# Altium PCB PID Controller.PcbDoc
Units mm, origin at the board's own origin, x right, y up, seen from the top; angles counter-clockwise.
Board outline 114.55 x 70.6 mm, 2 copper layers (Top Layer, Bottom Layer); 26 components, 18 nets, 84 pads, 16 vias.
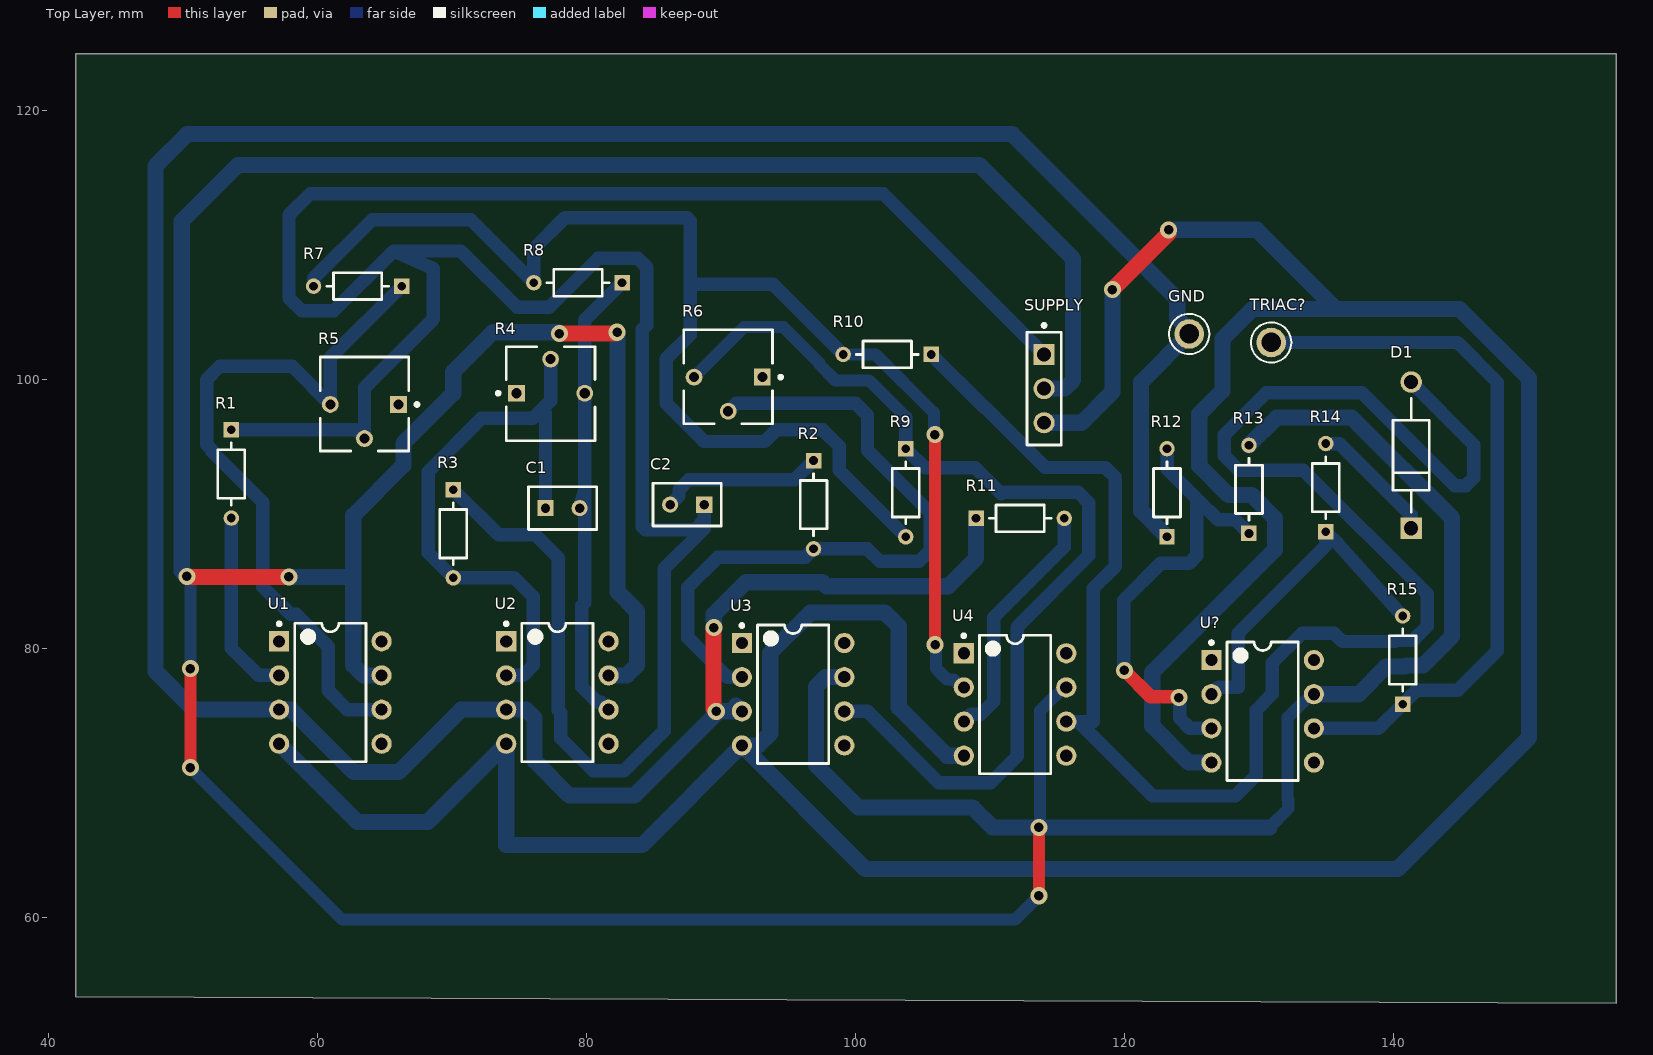
[diagram p0: Top Layer view]
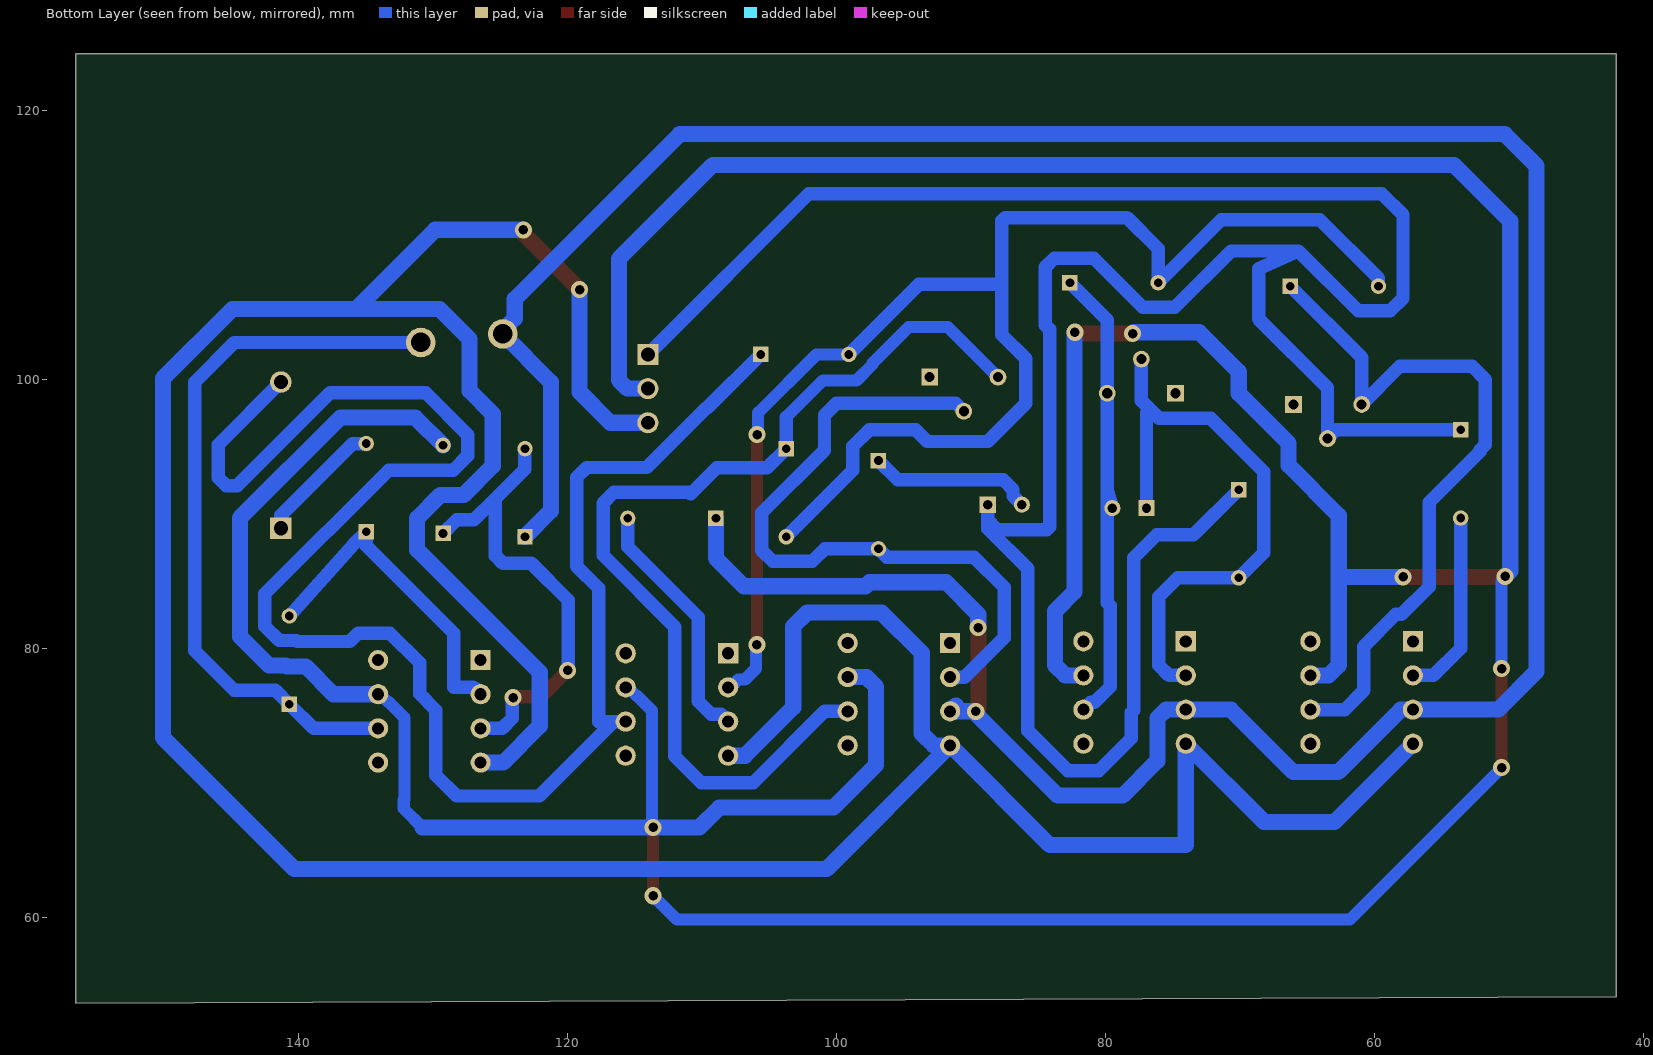
[diagram p1: Bottom Layer view, seen from below]

## Layer stack, top to bottom
Top Solder: solder mask 0.0102, Solder Resist, Dk 3.5
Top Layer: signal copper 0.0356
Dielectric 1: dielectric 0.32, FR-4, Dk 4.8
Bottom Layer: signal copper 0.0356
Bottom Solder: solder mask 0.0102, Solder Resist, Dk 3.5

## Board outline
42.037,54.087 156.591,53.611 156.591,124.206 42.037,124.206

## Design rules (kind name [scope] priority, off if disabled: settings)
Clearance [All] p1: gap=0.75 ignorepadtopadclearanceinfootprint=FALSE
PolygonConnect [All] p1: connectstyle=Relief reliefconductorwidth=0.254 reliefentries=4 polygonreliefangle="90 Angle" airgapwidth=0.254
RoutingVias [All] p1: holewidth=0.711 width=1.27 viastyle="Through Hole" minholewidth=0.711 minwidth=1.27 maxholewidth=0.711 maxwidth=1.27
SolderMaskExpansion [All] p1: expansion=0.102 istentingtop=FALSE
Width Width_Power [(InNet('-12') OR InNet('+12') OR InNet('GND'))] p1: maxlimit=1.4 minlimit=0.9 preferedwidth=1.2
Width [All] p2: maxlimit=1 minlimit=0.9 preferedwidth=0.9
30 further rules are at their usual default settings.

## Components (designator, comment, footprint, x,y, rotation, side; value= is the part's Value field where it differs from the comment)
C1 "SR205C104KAR" FP-SR20-MFG 78.232,90.424 r0 top value=100nF
C2 "SR205C104KAR" FP-SR20-MFG 87.503,90.678 r180 top value=100nF
D1 "1N4007-E3/54" FP-1N4007-MFG 141.351,94.361 r90 top value=15pF
GND "1801-0-15-15-30-27-04-0" FP-1801-0-15-15-30-27-04-MFG 124.841,103.378 r0 top
R1 "CF18JT2K20" FP-CF18-MFG 53.594,92.964 r270 top value=2.2kΩ
R2 "CF18JT2K20" FP-CF18-MFG 96.901,90.678 r270 top value=2.2kΩ
R3 "CF18JT2K20" FP-CF18-MFG 70.104,88.519 r270 top value=2.2kΩ
R4 "3362P-1-104LF" BOUR-3362P 77.343,98.933 r0 top
R5 "3362P-1-104LF" BOUR-3362P 63.5,98.171 r180 top
R6 "3362P-1-104LF" BOUR-3362P 90.551,100.203 r180 top
R7 "CF18JT2K20" FP-CF18-MFG 62.992,106.934 r180 top value=2.2kΩ
R8 "CF18JT2K20" FP-CF18-MFG 79.375,107.188 r180 top value=1kΩ
R9 "CF18JT2K20" FP-CF18-MFG 103.759,91.567 r270 top value=1kΩ
R10 "CF18JT2K20" FP-CF18-MFG 102.384,101.854 r180 top value=2.2kΩ
R11 "CF18JT2K20" FP-CF18-MFG 112.268,89.662 r0 top value=2.2kΩ
R12 "CF18JT2K20" FP-CF18-MFG 123.19,91.567 r90 top value=10kΩ
R13 "CF18JT2K20" FP-CF18-MFG 129.286,91.821 r90 top value=10kΩ
R14 "CF18JT2K20" FP-CF18-MFG 135.001,91.948 r90 top value=10kΩ
R15 "CF18JT2K20" FP-CF18-MFG 140.716,79.121 r90 top value=10kΩ
SUPPLY "SSQ-103-01-T-S" FP-SSQ-103-01-T-S-MFG 114.046,99.314 r270 top
TRIAC? "1801-0-15-15-30-27-04-0" FP-1801-0-15-15-30-27-04-MFG 130.937,102.743 r90 top
U1 "LM741CN" N08E 60.96,76.708 r0 top
U2 "LM741CN" N08E 77.851,76.708 r0 top
U3 "LM741CN" N08E 95.377,76.581 r0 top
U4 "LM741CN" N08E 111.887,75.819 r0 top
U? "LM741CN" N08E 130.302,75.311 r0 top

## Footprints (in the part's own frame and the unit in brackets; to place one, negate y for a bottom-side part, rotate by r counter-clockwise, add the part's x,y. Pads: shape width x height; smd on the part's side, far side on the other; paste and mask are expansions set on the pad)
BOUR-3362P [mm] "THD, 3-Leads, Body 6.6x6.99mm, Pitch 2.54mm"
  rect 1.25x1.25 hole 0.75: 1(-2.54,0.035)
  round 1.25 hole 0.75: 2(0,2.575) 3(2.54,0.035)
  silkscreen extent -4.02,-3.49 3.3,3.49, body extent -3.3,-3.49 3.3,3.49, height 4.95
FP-1N4007-MFG [mm]
  rect 1.6x1.6 hole 1.05 paste-1000 mask+0: 1(-5.438,0)
  round 1.6 hole 1.05 paste-1000 mask+0: 2(5.438,0)
  silkscreen extent -4.24,-1.35 4.24,1.35, body extent -6.34,-1.45 6.34,1.45, height 0.25
FP-1801-0-15-15-30-27-04-MFG [mm]
  round 2.2 hole 1.45 paste-1000 mask+0: 1(0,0)
  silkscreen extent -1.5,-1.5 1.5,1.5, body extent -1.2,-1.2 1.2,1.2, height 0.25
FP-CF18-MFG [mm]
  rect 1.15x1.15 hole 0.65 paste-1000 mask+0: 1(-3.28,0)
  round 1.15 hole 0.65 paste-1000 mask+0: 2(3.28,0)
  silkscreen extent -2.3,-1 2.3,1
FP-SR20-MFG [mm]
  rect 1.2x1.2 hole 0.7 paste-1000 mask+0: 1(-1.27,0)
  round 1.2 hole 0.7 paste-1000 mask+0: 2(1.27,0)
  silkscreen extent -2.54,-1.59 2.54,1.59, body extent -2.64,-1.69 2.64,1.69, height 0.25
FP-SSQ-103-01-T-S-MFG [mm]
  rect 1.57x1.57 hole 1.02 paste-1000 mask+0: 1(-2.54,0)
  round 1.57 hole 1.02 paste-1000 mask+0: 2(0,0) 3(2.54,0)
  silkscreen extent -4.82,-1.27 4.19,1.27, body extent -4.29,-1.37 4.29,1.37, height 0.25
N08E [mm] "DIP, 8-Pin, Row Spacing 7.62 mm, Pitch 2.54 mm"
  rect 1.5x1.5 hole 0.9: 1(-3.81,3.81)
  round 1.5 hole 0.9: 2(-3.81,1.27) 3(-3.81,-1.27) 4(-3.81,-3.81) 5(3.81,-3.81) 6(3.81,-1.27) 7(3.81,1.27) 8(3.81,3.81)
  silkscreen extent -3.93,-5.15 2.65,5.23, body extent -3.6,-5.15 3.6,5.15, height 5.33

## Part data
C1 C2: library part CMP-04427-000013-1, "CAP CER 0.1UF 50V X7R RADIAL", Capacitance=100nF, Manufacturer=AVX, Package=SR20, Temperature="-55°C to +125°C", Temperature Characteristic=X7R, Temperature Range High=+125°C, Temperature Range Low=-55°C, Tolerance=10%, Voltage=50V, Automotive=No, Category=Cap, ComponentLink2Description=Datasheet, ComponentLink2URL=http://datasheets.avx.com/SR-Series.pdf, Device Class L1="Passive Components", Device Class L2=Capacitors, Device Class L3="Ceramic Capacitors", Digikey Description="CAP CER 0.1UF 50V X7R RADIAL", Height=5.08mm, Lead Free=Yes, Manufacturer Part Number=SR205C104KAR, Material=Ceramic, Mouser Description="Multilayer Ceramic Capacitors MLCC - Leaded 50volts 0.1uF 10% X7R", Octopart=https://octopart.com/sr205c104kar-avx-145048, RoHS=TRUE, Voltage Rating=50V
D1: library part CMP-02540-000046-1, "DIODE GEN PURP 1KV 1A DO204AL", Capacitance=15pF, Forward Current=1A, Manufacturer=Vishay, Max Junction Temp=+150°C, Max Repetitive Reverse Voltage=1000V, Max Surge Forward Current=30A, Package=1N4007, Peak Reverse Current=30uA, Temperature="-50°C to +150°C", Temperature Range Low=-50°C, Automotive=No, Category=Diode, ComponentLink2Description=Datasheet, ComponentLink2URL=http://www.vishay.com/docs/88503/1n4001.pdf, Device Class L1="Discrete Semiconductors", Device Class L2=Diodes, Device Class L3="Rectifier Diodes", Digikey Description="DIODE GEN PURP 1KV 1A DO204AL", Height=2.7mm, Ipc Land Pattern Name=DIOPA1088W105L520D270, Lead Free=Yes, Manufacturer Part Number=1N4007-E3/54, Mouser Description="Rectifiers Vr/1000V Io/1A", Octopart=https://octopart.com/1n4007-e3%2F54-vishay-39548207, RoHS=TRUE, Temperature Range High=+150°C
GND TRIAC?: library part CMP-07777-000001-1, "CONN PIN RCPT .015-.025 PRESSFIT", Current Rating=3A, Manufacturer=Mill-Max, Temperature="-55°C to +125°C", Temperature Range High=+125°C, Temperature Range Low=-55°C, Automotive=No, Category=Conn, ComponentLink2Description=Datasheet, ComponentLink2URL=https://www.mill-max.com/products/datasheet/recpin/1801-0-15-15-30-27-04-0, Conn Orientation=Straight, Contact Material=Gold,Nickel, Device Class L1=Connectors, Device Class L2=unset, Device Class L3=unset, Digikey Description="CONN PIN RCPT .015-.025 PRESSFIT", Height=4.32mm, Is Female=yes, Lead Free=Yes, Manufacturer Part Number=1801-0-15-15-30-27-04-0, Mouser Description="Circuit Board Hardware - PCB 10u AU OVER NI 30 CON", Number Of Contacts=1, Octopart=https://octopart.com/1801-0-15-15-30-27-04-0-mill-max-1175098, Package=1801-0-15-15-30-27-04-0, RoHS=TRUE
R1 R2 R3 R12 R13 R14 R15: library part CMP-26528-000001-1, "RES 2.2K OHM 1/8W 5% CF AXIAL", Manufacturer="Stackpole Electronics Inc", Package=CF18, Power Rating=0.125W, Resistance=1kΩ, Temperature="-55°C to +155°C", Temperature Coefficient=0/-400ppm/°C, Temperature Range High=+155°C, Temperature Range Low=-55°C, Tolerance=5%, Voltage Rating=250V, Automotive=No, Category=Res, ComponentLink2Description=Datasheet, ComponentLink2URL=https://www.seielect.com/catalog/sei-cf_cfm.pdf, Composition="Carbon Film", Device Class L1="Passive Components", Device Class L2=Resistors, Device Class L3="Through-Hole Resistors", Digikey Description="RES 2.2K OHM 1/8W 5% CF AXIAL", Height=2mm, Ipc Land Pattern Name=RESAD656W65L360D200, Lead Free=Yes, Manufacturer Part Number=CF18JT2K20, Octopart=https://octopart.com/cf18jt2k20-stackpole+electronics-19205714, RoHS=TRUE, Series=CF
R4 R5 R6: library part CMP-1747-00003-1, "Square Trimpot(R) Trimming Potentiometer, 100 KOhm, 300 V, -55 to 125 degC, 3-Pin THD, RoHS, Tube", Case\Package=Axial, Max Operating Temperature="155 degC", Min Operating Temperature="-55 degC", Package Quantity=200, Power Rating="250 mW", Resistance="1 mohm", Tolerance=1%, Voltage Rating="250 V", ComponentLink1Description="Manufacturer URL", ComponentLink1URL=http://www.bourns.com/, ComponentLink2Description=Datasheet, ComponentLink2URL=http://www.bourns.com/docs/Product-Datasheets/3362.pdf, DatasheetVersion=May-16, Length="0.248 inch", Mount="Through Hole", PackageDescription="3-Pin Through Hole Device, Body 6.6 x 6.99 mm, Pitch 2.54 mm", PackageReference=3326P, Packaging=Bulk, RoHSCompliant=true
R7 R8 R9 R10 R11: library part CMP-26528-000001-1, "RES 2.2K OHM 1/8W 5% CF AXIAL", Manufacturer="Stackpole Electronics Inc", Package=CF18, Power Rating=0.125W, Resistance=100kΩ, Temperature="-55°C to +155°C", Temperature Coefficient=0/-400ppm/°C, Temperature Range High=+155°C, Temperature Range Low=-55°C, Tolerance=5%, Voltage Rating=250V, Automotive=No, Category=Res, ComponentLink2Description=Datasheet, ComponentLink2URL=https://www.seielect.com/catalog/sei-cf_cfm.pdf, Composition="Carbon Film", Device Class L1="Passive Components", Device Class L2=Resistors, Device Class L3="Through-Hole Resistors", Digikey Description="RES 2.2K OHM 1/8W 5% CF AXIAL", Height=2mm, Ipc Land Pattern Name=RESAD656W65L360D200, Lead Free=Yes, Manufacturer Part Number=CF18JT2K20, Octopart=https://octopart.com/cf18jt2k20-stackpole+electronics-19205714, RoHS=TRUE, Series=CF
SUPPLY: library part CMP-02766-001396-1, "CONN RCPT 3POS 0.1 TIN PCB", Color=Black, Contact Resistance=10mR, Max Current Rating=7.6A, Max Operating Temperature=105°C, Max Voltage Rating (AC)=550V, Min Operating Temperature=-55°C, Connector Type=Receptacle, Contact Material=Bronze, Contact Plating=Tin, Contact Type="Female Socket", Gender=Female, Height=8.51mm, Housing Color=Black, Housing Material=Plastic, Lead Free="Lead Free", Length=8.13mm, Mount="Through Hole", Number Of Contacts=3, Number of Positions=3, Number Of Rows=1, Orientation=Straight, Packaging=Bulk, Pitch=2.54mm, Radiation Hardening=No, RoHS Compliant=Yes, Series=SSQ, Termination=Solder, Width=2.41mm
U1 U2 U3 U4 U?: library part CMP-0055-00155-2, "Operational Amplifier, 8-pin MDIP", Manufacturer="National Semiconductor", PackageTopMarking=NSUZXYTTE#*LM*741CN, PowerWise=N, Code_JEDEC=MS-001-BA, ComponentLink1Description="LM741 Datasheet", ComponentLink1URL=http://www.national.com/ds/LM/LM741.pdf, ComponentLink2Description="LM741 Web Page", ComponentLink2URL=http://www.national.com/pf/LM/LM741.html, ComponentLink3Description="N08E Package Page", ComponentLink3URL=http://www.national.com/packaging/folders/n08e.html, CompType=Amplifiers, DatasheetVersion=Aug-2000, PackageDescription="MDIP, .365 x .250 x .130in, 8 Lead, .100in Pitch", PackageReference=N08E, PackageVersion="revG, May-2006", PinCount=8, RevisionNote="Component URLs added", RoHS=N

## Via types
v1: diameter 1.27, hole 0.711, Top Layer to Bottom Layer, 16 vias

## Nets (pads, with @x,y where several pads share a name; then routed paths per layer and width w, separated by ;. In a path a pad name is that pad's centre, name@x,y a point inside that pad or via, vN(x,y) a via of type N, cw(c..) or ccw(c..) an arc to the next point about the centre after c; other vN are vias at no path point)
+12: R13.2 SUPPLY.2 U1.7 U2.7 U3.7 U4.7 U?.7 | length 384.6
  Top Layer w0.9: v1(50.546,71.12) 50.549,71.123 50.549,78.489 v1(50.553,78.493) ; v1(113.665,61.595) v1(113.665,66.675)
  Top Layer w1.2: v1(50.292,85.344) 50.311,85.344 50.346,85.309 v1(57.869,85.309) ; v1(77.998,103.408) 82.175,103.408 82.272,103.505 v1(82.291,103.505)
  Bottom Layer w0.9: v1(50.292,85.344) 50.292,85.244 50.553,84.983 v1(50.553,78.493) ; v1(50.546,71.12) 61.849,59.817 111.887,59.817 v1(113.665,61.595) ; v1(113.665,66.675) 113.747,66.757 113.747,75.357 114.889,76.499 114.945,76.499 115.535,77.089 U4.7 ; 130.81,66.675 132.207,68.072 132.207,68.707 132.162,68.752 132.162,74.849 133.304,75.991 133.36,75.991 133.95,76.581 U?.7
  Bottom Layer w1.2: v1(50.292,85.344) 50.292,85.363 49.911,85.744 49.911,111.76 54.102,115.951 109.22,115.951 116.205,108.966 116.205,99.949 115.57,99.314 SUPPLY.2 ; v1(57.869,85.309) 62.57,85.309 62.662,85.217 ; U1.7 63.424,77.978 62.662,78.74 62.662,85.217 ; v1(77.998,103.408) 77.979,103.408 77.882,103.505 73.041,103.505 70.104,100.568 70.104,98.958 66.396,95.25 66.396,93.599 62.662,89.865 62.662,85.217 ; U2.7 83.007,77.978 83.769,78.74 83.769,82.753 82.321,84.201 v1@82.321,103.505 ; U3.7@99.238,77.8 U3.7 97.79,77.851 97.079,77.14 97.079,71.323 100.254,68.148 108.737,68.148 110.211,66.675 v1(113.665,66.675) 130.81,66.675 ; R13.2 131.34,97.155 136.924,97.155 144.391,89.688 144.391,80.879 142.238,78.726 140.985,78.726 140.912,78.654 139.512,78.654 137.439,76.581 U?.7
-12: SUPPLY.3 U1.4 U2.4 U3.4 U4.4 U?.4 | length 277.7
  Top Layer w1.2: v1(119.126,106.68) 123.304,110.858 123.304,111.112 v1(123.317,111.125)
  Bottom Layer w1.2: U1.4 62.967,67.081 68.224,67.081 U2.4 74.041,65.38 74.066,65.354 84.15,65.354 U3.4 ; U4.4 106.832,72.009 103.237,75.604 103.237,81.624 102.199,82.662 96.682,82.662 93.675,79.654 93.675,73.66 92.786,72.771 U3.4 ; SUPPLY.3 116.84,96.774 119.126,99.06 v1(119.126,106.68) ; v1(123.317,111.125) 129.87,111.125 135.763,105.232 ; U?.4 124.816,71.501 122.094,74.223 122.094,78.203 131.211,87.32 131.211,89.675 129.485,91.401 127.753,91.401 125.586,93.568 125.586,97.423 127.305,99.142 127.305,102.997 129.54,105.232 135.763,105.232 ; U3.4 100.758,63.58 140.339,63.58 150.114,73.355 150.114,100.076 144.958,105.232 135.763,105.232
GND: GND.1 R11.1 R12.1 U1.3 U2.3 U3.3 | length 228.1
  Top Layer w1.2: v1(89.488,81.529) 89.488,81.51 89.467,81.49 89.467,75.525 89.662,75.33 v1(89.662,75.311)
  Bottom Layer w1.2: v1(89.488,81.529) 89.474,81.543 89.474,82.484 89.459,82.499 91.872,84.912 97.561,84.912 97.862,84.612 106.909,84.612 108.988,86.691 R11.1 ; U3.3@91.135,75.743 U3.3 89.833,75.311 83.56,69.037 78.74,69.037 76.149,71.628 76.149,74.803 75.514,75.438 U2.3 70.688,75.438 66.04,70.79 62.713,70.79 58.064,75.438 U1.3 50.8,75.438 47.955,78.283 47.955,115.875 50.317,118.237 111.684,118.237 123.952,105.969 123.952,104.538 124.841,103.649 GND.1 121.26,99.797 121.26,90.217 R12.1
NetC1_1: C1.1 R3.2 R4.2 U2.2 | length 44.5
  Bottom Layer w1: U2.2 75.286,77.978 76.048,78.74 76.048,83.82 74.629,85.239 R3.2 68.234,87.109 68.234,93.132 72.195,97.093 76.011,97.093 76.708,97.79 ; C1.1 76.962,97.536 76.708,97.79 ; R4.2 77.343,98.425 76.708,97.79
NetC1_2: C1.2 R4.3 R8.1 U2.6 | length 35.5
  Bottom Layer w1: C1.2 79.883,91.846 ; U2.6 81.121,75.978 80.833,75.978 79.661,77.15 79.661,83.16 79.883,83.382 79.883,91.846 ; R8.1 79.883,104.416 R4.3 79.883,91.846
NetC2_1: C2.1 R1.1 R3.1 R5.2 SUPPLY.1 | length 204.3
  Bottom Layer w1: R1.1 62.852,96.244 R5.2 63.5,99.365 68.63,104.494 68.63,108.231 65.664,109.55 ; R3.1 73.471,88.432 76.2,88.432 77.911,86.721 77.911,75.4 78.103,75.208 78.103,73.313 80.518,70.898 82.804,70.898 85.78,73.874 85.78,85.907 88.773,88.9 88.773,89.535 ; C2.1 88.773,89.535 ; SUPPLY.1 102.083,113.817 59.461,113.817 57.887,112.243 57.887,106.045 58.826,105.105 61.219,105.105 65.664,109.55 ; 65.664,109.55 70.663,109.55 74.854,105.359 77.241,105.359 80.899,109.017 83.82,109.017 84.48,108.356 84.48,104.016 84.176,103.712 84.176,89.027 84.379,88.824 88.062,88.824 88.773,89.535
NetC2_2: C2.2 R2.1 | length 12.3
  Bottom Layer w1: C2.2 86.893,91.338 86.893,91.796 87.63,92.532 95.475,92.532 R2.1
NetD1_1: D1.1 R14.2 | length 9.5
  Bottom Layer w1: R14.2 136,95.228 141.351,89.877 D1.1
NetD1_2: D1.2 R10.1 U4.6 | length 131.8
  Bottom Layer w1: R10.1 109.649,97.869 109.7,97.869 114.122,93.447 118.593,93.447 119.329,92.71 119.329,86.081 117.704,84.455 117.704,74.549 116.586,74.549 ; U4.6 116.586,74.549 ; D1.2 146.006,95.144 146.006,92.69 145.42,92.104 144.592,92.104 137.691,99.005 130.574,99.005 127.436,95.867 127.436,94.335 128.52,93.251 133.336,93.251 142.541,84.046 142.541,81.645 141.472,80.576 140.218,80.576 140.146,80.504 136.235,80.504 135.611,81.128 133.248,81.128 131.031,78.91 131.031,76.611 129.819,75.399 129.819,70.561 128.27,69.012 122.123,69.012 116.586,74.549
NetR1_2: R1.2 U1.2 | length 14.1
  Bottom Layer w1: R1.2 53.594,80.01 55.626,77.978 U1.2
NetR2_2: R2.2 R6.2 U3.2 | length 51.9
  Bottom Layer w1: R6.2 91.145,98.222 100.025,98.222 100.914,97.333 100.914,94.74 105.588,90.067 105.588,87.274 104.775,86.462 101.818,86.462 100.881,87.398 R2.2 96.269,86.766 89.789,86.766 87.554,84.531 87.554,80.797 90.5,77.851 U3.2
NetR5_3: R5.3 R7.1 U1.6 | length 53.4
  Bottom Layer w1: U1.6 62.23,75.438 60.808,76.86 60.808,80.128 58.418,82.518 57.995,82.518 55.935,84.578 55.935,90.852 52.142,94.645 52.142,94.778 51.769,95.151 51.769,99.99 52.744,100.965 58.131,100.965 R5.3 60.96,101.622 R7.1
NetR6_3: R6.3 R9.1 U3.6 | length 74.8
  Bottom Layer w0.9: R6.3 91.729,103.886 94.668,103.886 97.329,101.225 97.329,101.119 98.526,99.922 101.036,99.922 103.759,97.199
  Bottom Layer w1: U3.6 100.914,75.311 106.223,70.002 110.084,70.002 112.047,71.966 112.047,81.581 117.373,86.907 117.373,90.805 116.586,91.592 110.744,91.592 ; 103.759,97.199 R9.1 105.192,93.414 108.922,93.414 110.744,91.592 ; 110.846,91.491 110.744,91.592
NetR7_2: R7.2 R8.2 R9.2 R10.2 U4.2 | length 117.8
  Top Layer w0.9: v1(105.918,95.885) 105.93,95.873 105.93,80.276 v1(105.942,80.264)
  Bottom Layer w0.9: R10.2 101.508,101.854 105.847,97.515 105.847,95.956 v1(105.918,95.885) ; v1(105.942,80.264) 106.013,80.193 106.013,78.496 106.83,77.679 107.325,77.679 107.915,77.089 U4.2
  Bottom Layer w1: R7.2 59.712,107.515 64.081,111.884 71.399,111.884 R8.2 76.095,109.715 78.416,112.036 87.47,112.036 87.718,111.788 87.718,107.061 ; R10.2 93.897,107.061 87.718,107.061 ; R9.2 98.801,93.245 98.801,95.023 97.585,96.24 94.136,96.24 93.273,95.377 88.773,95.377 85.928,98.222 85.928,101.539 87.718,103.328 87.718,107.061
NetR11_2: R11.2 U4.3 | length 18.6
  Bottom Layer w1: U4.3 108.61,75.082 109.325,75.082 110.297,76.054 110.297,82.306 115.548,87.557 R11.2
NetR12_2: R12.2 R13.1 U?.3 | length 35
  Top Layer w1: v1(120.015,78.359) 121.995,76.379 124.027,76.379 v1(124.079,76.327)
  Bottom Layer w1: v1(120.015,78.359) 119.98,78.394 119.98,83.582 122.707,86.309 124.825,86.309 125.411,86.895 125.411,91.127 ; R12.2 123.219,94.818 123.219,93.319 125.411,91.127 ; v1(124.079,76.327) 124.131,76.275 124.131,74.802 124.866,74.066 126.467,74.066 U?.3 ; R13.1 128.276,89.551 126.987,89.551 125.411,91.127
NetR14_1: R14.1 R15.2 U?.2 | length 25
  Bottom Layer w1: U?.2 127.025,77.114 128.499,77.114 128.499,81.128 135.001,87.63 R14.1 135.941,87.728 R15.2
NetR15_1: R15.1 TRIAC?.1 U?.6 | length 54.1
  Bottom Layer w1: TRIAC?.1 144.805,102.743 147.756,99.792 147.756,79.811 144.821,76.876 141.751,76.876 R15.1 138.916,74.041 U?.6
pads on no net: R4.1 R5.1 R6.1 U1.1 U1.5 U1.8 U2.1 U2.5 U2.8 U3.1 U3.5 U3.8 U4.1 U4.5 U4.8 U?.1 U?.5 U?.8